# Altium PCB 003-00006.PcbDoc
Units mil, origin at the board's own origin, x right, y up, seen from the top; angles counter-clockwise.
Board outline 1076.1 x 992.63 mil, 2 copper layers (Top Layer, Bottom Layer); 65 components, 66 nets, 188 pads, 60 vias.
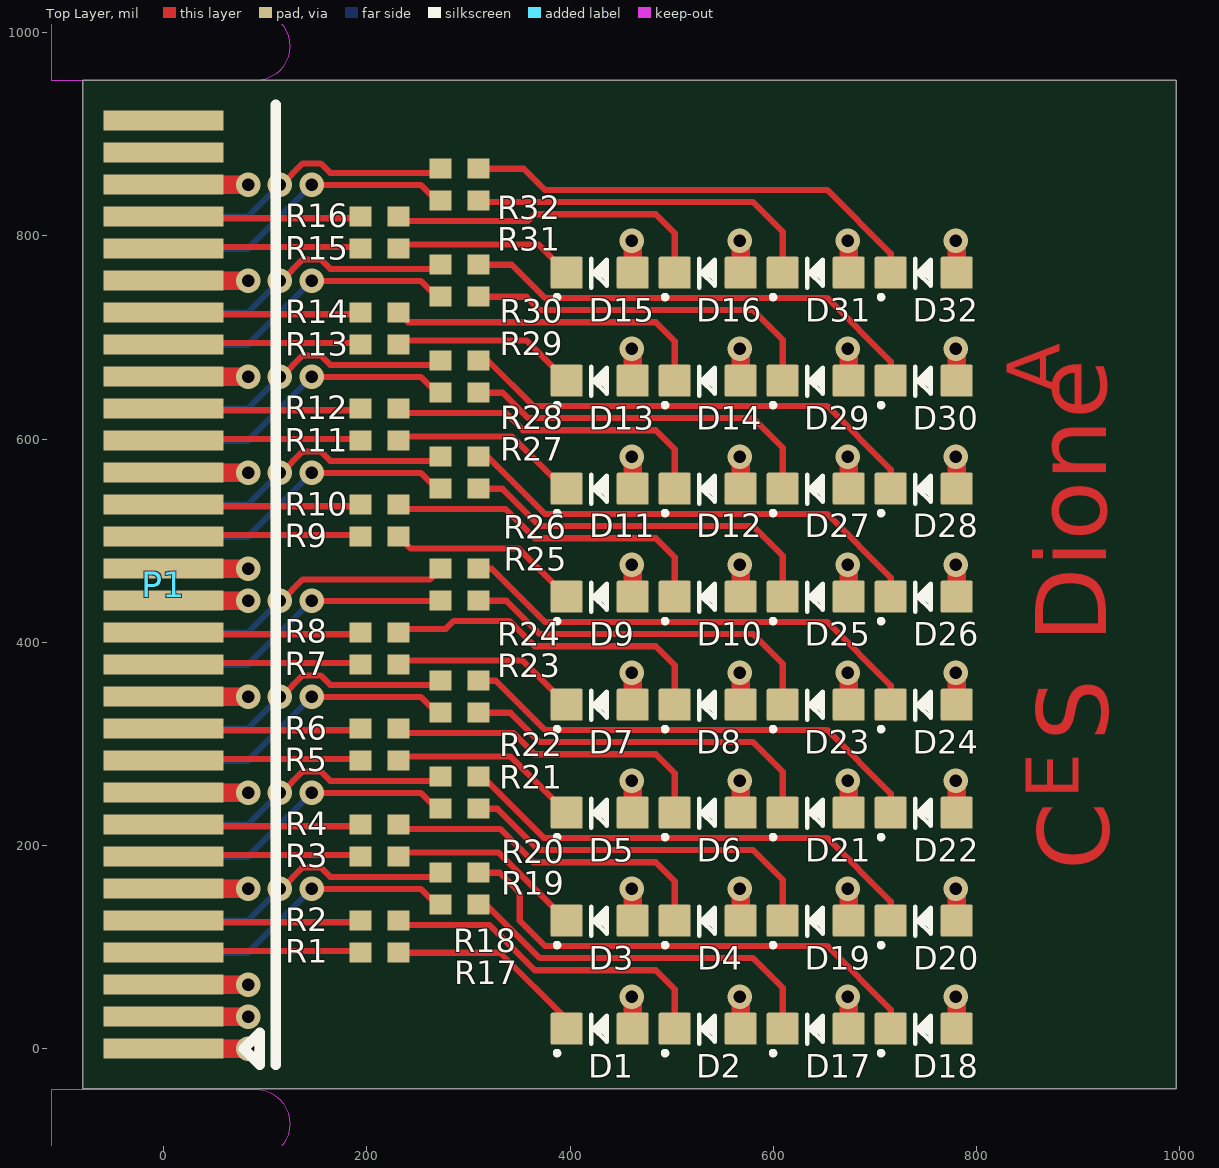
[diagram p0: Top Layer view]
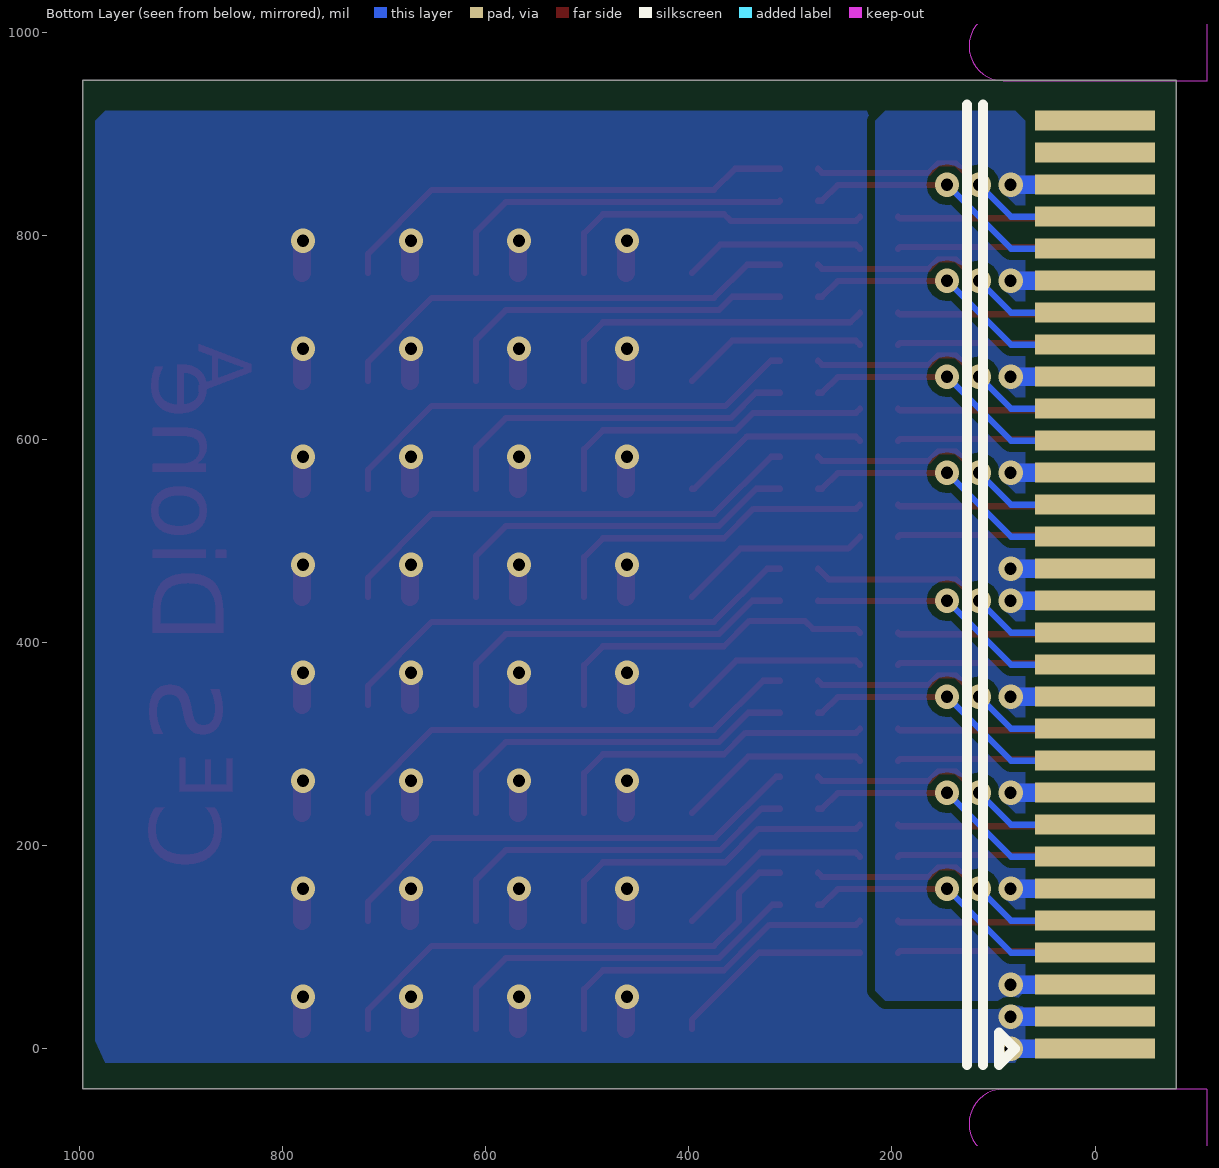
[diagram p1: Bottom Layer view, seen from below]

## Layer stack, top to bottom
Top Solder: solder mask 0.4, Solder Resist, Dk 3.5
Top Layer: signal copper 1.4
Dielectric1: core 12.6, FR-4, Dk 4.8
Bottom Layer: signal copper 1.4
Bottom Solder: solder mask 0.4, Solder Resist, Dk 3.5

## Board outline
-79.72,-39.37 996.38,-39.37 996.38,953.26 -79.72,953.26

## Design rules (kind name [scope] priority, off if disabled: settings)
Clearance Clearance_poly [InPolygon] p1: gap=8
Clearance [All] p2: gap=6
ComponentClearance [All] p1: gap=0 collisioncheckmode=3 verticalgap=0 showdistances=FALSE
DiffPairsRouting [All] p1: maxlimit=6 minlimit=6 mostfreqgap=6 toplayer_minwidth=6 toplayer_maxwidth=6 toplayer_prefwidth=6 bottomlayer_minwidth=6 bottomlayer_maxwidth=6 bottomlayer_prefwidth=6 maxuncoupledlength=500
HoleSize [All] p1: absolutevalues=TRUE maxlimit=500 minlimit=10 maxpercent=80.000 minpercent=20.000
HoleToHoleClearance [All] p1: gap=6 allowstackedmicrovias=TRUE
MinimumSolderMaskSliver [All] p1: minsoldermaskwidth=0
NetAntennae [not(InNet('PRSNTN'))] p1: netantennaetolerance=0
PlaneClearance [All] p1: clearance=10
PlaneConnect [All] p1: planeconnectstyle=Direct reliefexpansion=20 reliefentries=4 reliefconductorwidth=10 reliefairgap=10
PolygonConnect [All] p1: connectstyle=Direct reliefconductorwidth=10 reliefentries=4 polygonreliefangle="90 Angle" airgapwidth=10
RoutingCorners [All] p1: cornerstyle=45-Degree minsetback=30 maxsetback=30
RoutingVias [All] p1: holewidth=12 width=24 viastyle="Through Hole" minholewidth=12 minwidth=24 maxholewidth=28 maxwidth=50
SilkToSilkClearance [All] p1: silktosilkclearance=0
SilkToSolderMaskClearance SilkscreenOverComponentPads [IsPad] p1: minsilkscreentomaskgap=0 clearancetoexposedcopper=TRUE
SolderMaskExpansion [All] p1: expansion=4
UnpouredPolygon [All] p1: allowunpoured=FALSE
Width [All] p1: maxlimit=80 minlimit=6 preferedwidth=6 minimp=50.000000 maximp=50.000000 favimp=50.000000
18 further rules are at their usual default settings.

## Components (designator, comment, footprint, x,y, rotation, side; value= is the part's Value field where it differs from the comment)
D1 "" 005-00018 429.13,19.69 r90 top
D2 "" 005-00018 535.43,19.69 r90 top
D3 "" 005-00018 429.13,125.98 r90 top
D4 "" 005-00018 535.43,125.98 r90 top
D5 "" 005-00018 429.13,232.28 r90 top
D6 "" 005-00018 535.43,232.28 r90 top
D7 "" 005-00018 429.13,338.58 r90 top
D8 "" 005-00018 535.43,338.58 r90 top
D9 "" 005-00018 429.13,444.88 r90 top
D10 "" 005-00018 535.43,444.88 r90 top
D11 "" 005-00018 429.13,551.18 r90 top
D12 "" 005-00018 535.43,551.18 r90 top
D13 "" 005-00018 429.13,657.48 r90 top
D14 "" 005-00018 535.43,657.48 r90 top
D15 "" 005-00018 429.13,763.78 r90 top
D16 "" 005-00018 535.43,763.78 r90 top
D17 "" 005-00018 641.73,19.69 r90 top
D18 "" 005-00018 748.03,19.69 r90 top
D19 "" 005-00018 641.73,125.98 r90 top
D20 "" 005-00018 748.03,125.98 r90 top
D21 "" 005-00018 641.73,232.28 r90 top
D22 "" 005-00018 748.03,232.28 r90 top
D23 "" 005-00018 641.73,338.58 r90 top
D24 "" 005-00018 748.03,338.58 r90 top
D25 "" 005-00018 641.73,444.88 r90 top
D26 "" 005-00018 748.03,444.88 r90 top
D27 "" 005-00018 641.73,551.18 r90 top
D28 "" 005-00018 748.03,551.18 r90 top
D29 "" 005-00018 641.73,657.48 r90 top
D30 "" 005-00018 748.03,657.48 r90 top
D31 "" 005-00018 641.73,763.78 r90 top
D32 "" 005-00018 748.03,763.78 r90 top
P1 "" 005-00024 0,771.65 r90 top
R1 "270" 005-00009 212.6,94.49 r180 top
R2 "270" 005-00009 212.6,125.98 r180 top
R3 "270" 005-00009 212.6,188.98 r180 top
R4 "270" 005-00009 212.6,220.47 r180 top
R5 "270" 005-00009 212.6,283.46 r180 top
R6 "270" 005-00009 212.6,314.96 r180 top
R7 "270" 005-00009 212.6,377.95 r180 top
R8 "270" 005-00009 212.6,409.45 r180 top
R9 "270" 005-00009 212.6,503.94 r180 top
R10 "270" 005-00009 212.6,535.43 r180 top
R11 "270" 005-00009 212.6,598.43 r180 top
R12 "270" 005-00009 212.6,629.92 r180 top
R13 "270" 005-00009 212.6,692.91 r180 top
R14 "270" 005-00009 212.6,724.41 r180 top
R15 "270" 005-00009 212.6,787.4 r180 top
R16 "270" 005-00009 212.6,818.9 r180 top
R17 "270" 005-00009 291.34,141.73 r180 top
R18 "270" 005-00009 291.34,173.23 r180 top
R19 "270" 005-00009 291.34,236.22 r180 top
R20 "270" 005-00009 291.34,267.72 r180 top
R21 "270" 005-00009 291.34,330.71 r180 top
R22 "270" 005-00009 291.34,362.2 r180 top
R23 "270" 005-00009 291.34,440.94 r180 top
R24 "270" 005-00009 291.34,472.44 r180 top
R25 "270" 005-00009 291.34,551.18 r180 top
R26 "270" 005-00009 291.34,582.68 r180 top
R27 "270" 005-00009 291.34,645.67 r180 top
R28 "270" 005-00009 291.34,677.17 r180 top
R29 "270" 005-00009 291.34,740.16 r180 top
R30 "270" 005-00009 291.34,771.65 r180 top
R31 "270" 005-00009 291.34,834.65 r180 top
R32 "270" 005-00009 291.34,866.14 r180 top

## Footprints (in the part's own frame and the unit in brackets; to place one, negate y for a bottom-side part, rotate by r counter-clockwise, add the part's x,y. Pads: shape width x height; smd on the part's side, far side on the other; paste and mask are expansions set on the pad)
005-00009 [mm] "Chip Resistor, 2-Leads, Body 1.00x0.50mm, IPC High Density"
  rect 0.55x0.5 smd: 1(-0.475,0) 2(0.475,0)
  body extent -0.53,-0.28 0.53,0.28, height 0.4
005-00018 [mm]
  rrect10% 0.8x0.8 smd: ANODE(0,-0.825) CATHODE(0,0.825)
  silkscreen extent -0.64,-0.18 0.35,1.1, body extent -0.37,-0.82 0.35,0.82, height 0.68
005-00024 [mm]
  rect 0.5x3 smd far side paste-0.5: 1(-19.6,0) 3(-18.8,0) 5(-18,0) 7(-17.2,0) 9(-16.4,0) 11(-15.6,0) 13(-14.8,0) 15(-14,0) 17(-13.2,0) 19(-12.4,0) 21(-11.6,0) 23(-10.8,0) 25(-10,0) 27(-9.2,0) 29(-8.4,0) 31(-7.6,0) 33(-6.8,0) 35(-6,0) 37(-5.2,0) 39(-4.4,0) 41(-3.6,0) 43(-2.8,0) 45(-2,0) 47(-1.2,0) 49(-0.4,0) 51(0.4,0) 53(1.2,0) 55(2,0) 57(2.8,0) 59(3.6,0)
  rect 0.5x3 smd paste-0.5: 2(-19.6,0) 4(-18.8,0) 6(-18,0) 8(-17.2,0) 10(-16.4,0) 12(-15.6,0) 14(-14.8,0) 16(-14,0) 18(-13.2,0) 20(-12.4,0) 22(-11.6,0) 24(-10.8,0) 26(-10,0) 28(-9.2,0) 30(-8.4,0) 32(-7.6,0) 34(-6.8,0) 36(-6,0) 38(-5.2,0) 40(-4.4,0) 42(-3.6,0) 44(-2.8,0) 46(-2,0) 48(-1.2,0) 50(-0.4,0) 52(0.4,0) 54(1.2,0) 56(2,0) 58(2.8,0) 60(3.6,0)
  Keep-Out Layer board cut-out: -22.34,2.8 -20.621,2.8 -20.615,2.794 -20.615,-2.283 -20.613,-2.286 -20.679,-2.616 -20.866,-2.897 -21.146,-3.084 -21.476,-3.15 -21.476,-3.15 -21.479,-3.15 -21.808,-3.084 -22.088,-2.897 -22.274,-2.618 -22.34,-2.289 -22.34,-2.289
  Keep-Out Layer board cut-out: 4.6,2.8 6.319,2.8 6.325,2.794 6.325,-2.283 6.327,-2.286 6.261,-2.616 6.074,-2.897 5.794,-3.084 5.464,-3.15 5.464,-3.15 5.461,-3.15 5.132,-3.084 4.852,-2.897 4.666,-2.618 4.6,-2.289 4.6,-2.289
  silkscreen extent -20,-2.8 4,-2

## Part data
D1 D2 D3 D4 D5 D6 D7 D8 D9 D10 D11 D12 D13 D14 D15 D16 D17 D18 D19 D20 D21 D22 D23 D24 D25 D26 D27 D28 D29 D30 D31 D32: library part 013-00003, "LED Green SMD 20mA 2.2V 0603"
P1: library part 008-00005, "Connector, PCB edge, MEC8, 30x2 Pin"
R1 R2 R3 R4 R5 R6 R7 R8 R9 R10 R11 R12 R13 R14 R15 R16 R17 R18 R19 R20 R21 R22 R23 R24 R25 R26 R27 R28 R29 R30 R31 R32: library part 009-00022, "RES 270 OHM 1/16W 5% 0402"

## Via types
v1: diameter 24, hole 12, Top Layer to Bottom Layer, 60 vias

## Nets (pads, with @x,y where several pads share a name; then routed paths per layer and width w, separated by ;. In a path a pad name is that pad's centre, name@x,y a point inside that pad or via, vN(x,y) a via of type N, cw(c..) or ccw(c..) an arc to the next point about the centre after c; other vN are vias at no path point)
3.3V: D1.ANODE D2.ANODE D3.ANODE D4.ANODE D5.ANODE D6.ANODE D7.ANODE D8.ANODE D9.ANODE D10.ANODE D11.ANODE D12.ANODE D13.ANODE D14.ANODE D15.ANODE D16.ANODE D17.ANODE D18.ANODE D19.ANODE D20.ANODE D21.ANODE D22.ANODE D23.ANODE D24.ANODE D25.ANODE D26.ANODE D27.ANODE D28.ANODE D29.ANODE D30.ANODE D31.ANODE D32.ANODE P1.1 P1.2 P1.3 P1.4 | length 1353.4
  Top Layer w18: P1.2 v1(83.11,0) ; P1.4 v1(83.11,31.5) ; v1(460.63,51.18) 461.61,50.2 D1.ANODE ; v1(460.63,157.48) 461.61,156.5 D3.ANODE ; v1(460.63,263.78) 461.61,262.8 D5.ANODE ; v1(460.63,370.08) 461.61,369.09 D7.ANODE ; v1(460.63,582.68) 461.61,581.69 D11.ANODE ; v1(460.63,688.98) 461.61,687.99 D13.ANODE ; v1(460.63,795.28) 461.61,794.29 D15.ANODE ; D9.ANODE v1@461.61,475.39 ; v1(566.93,51.18) 567.91,50.2 D2.ANODE ; v1(566.93,157.48) 567.91,156.5 D4.ANODE ; v1(566.93,263.78) 567.91,262.8 D6.ANODE ; v1(566.93,370.08) 567.91,369.09 D8.ANODE ; v1(566.93,476.38) 567.91,475.39 D10.ANODE ; v1(566.93,582.68) 567.91,581.69 D12.ANODE ; v1(566.93,688.98) 567.91,687.99 D14.ANODE ; v1(566.93,795.28) 567.91,794.29 D16.ANODE ; v1(673.23,51.18) 674.21,50.2 D17.ANODE ; v1(673.23,157.48) 674.21,156.5 D19.ANODE ; v1(673.23,263.78) 674.21,262.8 D21.ANODE ; v1(673.23,370.08) 674.21,369.09 D23.ANODE ; v1(673.23,476.38) 674.21,475.39 D25.ANODE ; v1(673.23,582.68) 674.21,581.69 D27.ANODE ; v1(673.23,688.98) 674.21,687.99 D29.ANODE ; v1(673.23,795.28) 674.21,794.29 D31.ANODE ; v1(779.53,51.18) 780.51,50.2 D18.ANODE ; v1(779.53,157.48) 780.51,156.5 D20.ANODE ; v1(779.53,263.78) 780.51,262.8 D22.ANODE ; v1(779.53,370.08) 780.51,369.09 D24.ANODE ; v1(779.53,582.68) 780.51,581.69 D28.ANODE ; v1(779.53,688.98) 780.51,687.99 D30.ANODE ; v1(779.53,795.28) 780.51,794.29 D32.ANODE ; D26.ANODE v1@780.51,475.39 ; v1@461.61,475.39 v1(460.63,476.38) v1@461.61,475.39
  Bottom Layer w18: P1.1 v1(83.11,0) ; P1.3 v1(83.11,31.5)
  other v1: 779.53,476.38
D0_N: P1.10 R2.2 | length 195.1
  Top Layer w6: P1.10 1.5,124.48 192.39,124.48 R2.2
D0_P: P1.8 R1.2 | length 195.1
  Top Layer w6: P1.8 1.5,95.99 192.39,95.99 R1.2
D1_N: P1.16 R4.2 | length 195.1
  Top Layer w6: P1.16 1.5,218.97 192.39,218.97 R4.2
D1_P: P1.14 R3.2 | length 195.1
  Top Layer w6: P1.14 1.5,190.48 192.39,190.48 R3.2
D2_N: P1.22 R6.2 | length 195.1
  Top Layer w6: P1.22 1.5,313.46 192.39,313.46 R6.2
D2_P: P1.20 R5.2 | length 195.1
  Top Layer w6: P1.20 1.5,284.97 192.39,284.97 R5.2
D3_N: P1.28 R8.2 | length 195.1
  Top Layer w6: P1.28 1.5,407.94 192.39,407.94 R8.2
D3_P: P1.26 R7.2 | length 195.1
  Top Layer w6: P1.26 1.5,379.46 192.39,379.46 R7.2
D4_N: P1.36 R10.2 | length 195.1
  Top Layer w6: P1.36 1.5,533.93 192.39,533.93 R10.2
D4_P: P1.34 R9.2 | length 195.1
  Top Layer w6: P1.34 1.5,505.44 192.39,505.44 R9.2
D5_N: P1.42 R12.2 | length 195.1
  Top Layer w6: P1.42 1.5,628.42 192.39,628.42 R12.2
D5_P: P1.40 R11.2 | length 195.1
  Top Layer w6: P1.40 1.5,599.93 192.39,599.93 R11.2
D6_N: P1.48 R14.2 | length 195.1
  Top Layer w6: P1.48 1.5,722.91 192.39,722.91 R14.2
D6_P: P1.46 R13.2 | length 195.1
  Top Layer w6: P1.46 1.5,694.42 192.39,694.42 R13.2
D7_N: P1.54 R16.2 | length 195.1
  Top Layer w6: P1.54 1.5,817.39 192.39,817.39 R16.2
D7_P: P1.52 R15.2 | length 195.1
  Top Layer w6: P1.52 1.5,788.91 192.39,788.91 R15.2
D8_N: P1.9 R18.2 | length 299.9
  Top Layer w6: v1(114.17,157.48) 115.97,157.48 136.97,178.48 154.37,178.48 163.7,169.15 268.56,169.15 R18.2
  Bottom Layer w6: P1.9 82.68,125.98 v1(114.17,157.48)
D8_P: P1.7 R17.2 | length 305.3
  Top Layer w6: v1(145.67,157.48) 146,157.15 253.35,157.15 268.77,141.73 R17.2
  Bottom Layer w6: P1.7 82.68,94.49 v1(145.67,157.48)
D9_N: P1.15 R20.2 | length 299.9
  Top Layer w6: v1(114.17,251.97) 115.97,251.97 136.97,272.97 154.37,272.97 163.7,263.64 268.56,263.64 R20.2
  Bottom Layer w6: P1.15 82.68,220.47 v1(114.17,251.97)
D9_P: P1.13 R19.2 | length 305.3
  Top Layer w6: v1(145.67,251.97) 146,251.64 253.35,251.64 268.77,236.22 R19.2
  Bottom Layer w6: P1.13 82.68,188.98 v1(145.67,251.97)
D10_N: P1.21 R22.2 | length 301.7
  Top Layer w6: R22.2 268.56,358.13 163.7,358.13 154.37,367.46 136.97,367.46 v1@115.97,346.46 ; v1@115.97,346.46 v1(114.17,346.46) v1@115.97,346.46
  Bottom Layer w6: P1.21 82.68,314.96 v1(114.17,346.46)
D10_P: P1.19 R21.2 | length 305.7
  Top Layer w6: R21.2 268.77,330.71 253.35,346.13 v1@146,346.13 ; v1@146,346.13 v1(145.67,346.46) v1@146,346.13
  Bottom Layer w6: P1.19 82.68,283.46 v1(145.67,346.46)
D11_N: P1.27 R24.2 | length 298.7
  Top Layer w6: v1(114.17,440.94) 115.97,440.94 136.97,461.94 262.14,461.94 R24.2
  Bottom Layer w6: P1.27 82.68,409.45 v1(114.17,440.94)
D11_P: P1.25 R23.2 | length 299
  Top Layer w6: v1(145.67,440.94) 146,440.61 272.31,440.61 R23.2
  Bottom Layer w6: P1.25 82.68,377.95 v1(145.67,440.94)
D12_N: P1.35 R26.2 | length 299.9
  Top Layer w6: v1(114.17,566.93) 115.97,566.93 136.97,587.93 154.37,587.93 163.7,578.6 268.56,578.6 R26.2
  Bottom Layer w6: P1.35 82.68,535.43 v1(114.17,566.93)
D12_P: P1.33 R25.2 | length 305.3
  Top Layer w6: v1(145.67,566.93) 146,566.6 253.35,566.6 268.77,551.18 R25.2
  Bottom Layer w6: P1.33 82.68,503.94 v1(145.67,566.93)
D13_N: P1.41 R28.2 | length 299.9
  Top Layer w6: v1(114.17,661.42) 115.97,661.42 136.97,682.42 154.37,682.42 163.7,673.09 268.56,673.09 R28.2
  Bottom Layer w6: P1.41 82.68,629.92 v1(114.17,661.42)
D13_P: P1.39 R27.2 | length 305.3
  Top Layer w6: v1(145.67,661.42) 146,661.09 253.35,661.09 268.77,645.67 R27.2
  Bottom Layer w6: P1.39 82.68,598.43 v1(145.67,661.42)
D14_N: P1.47 R30.2 | length 299.9
  Top Layer w6: v1(114.17,755.91) 115.97,755.91 136.97,776.91 154.37,776.91 163.7,767.57 268.56,767.57 R30.2
  Bottom Layer w6: P1.47 82.68,724.41 v1(114.17,755.91)
D14_P: P1.45 R29.2 | length 305.3
  Top Layer w6: v1(145.67,755.91) 146,755.57 253.35,755.57 268.77,740.16 R29.2
  Bottom Layer w6: P1.45 82.68,692.91 v1(145.67,755.91)
D15_N: P1.53 R32.2 | length 299.9
  Top Layer w6: v1(114.17,850.39) 115.97,850.39 136.97,871.39 154.37,871.39 163.7,862.06 268.56,862.06 R32.2
  Bottom Layer w6: P1.53 82.68,818.9 v1(114.17,850.39)
D15_P: P1.51 R31.2 | length 305.3
  Top Layer w6: v1(145.67,850.39) 146,850.06 253.35,850.06 268.77,834.65 R31.2
  Bottom Layer w6: P1.51 82.68,787.4 v1(145.67,850.39)
GND: P1.5 P1.6 P1.11 P1.12 P1.17 P1.18 P1.23 P1.24 P1.29 P1.30 P1.31 P1.32 P1.37 P1.38 P1.43 P1.44 P1.49 P1.50 P1.55 P1.56 | length 1662.2
  Top Layer w18: P1.6 v1(83.11,62.99) ; P1.12 v1(83.11,157.48) ; P1.18 v1(83.11,251.97) ; P1.24 v1(83.11,346.46) ; P1.30 v1(83.11,440.94) ; P1.32 v1(83.11,472.44) ; P1.38 v1(83.11,566.93) ; P1.44 v1(83.11,661.42) ; P1.50 v1(83.11,755.91) ; P1.56 v1(83.11,850.39)
  Bottom Layer w18: P1.5 v1(83.11,62.99) ; P1.11 v1(83.11,157.48) ; P1.17 v1(83.11,251.97) ; P1.23 v1(83.11,346.46) ; P1.29 v1(83.11,440.94) ; P1.31 v1(83.11,472.44) ; P1.37 v1(83.11,566.93) ; P1.43 v1(83.11,661.42) ; P1.49 v1(83.11,755.91) ; P1.55 v1(83.11,850.39)
NetD1_CATHODE: D1.CATHODE R1.1 | length 201.7
  Top Layer w6: R1.1 330.98,94.49 396.65,28.81 D1.CATHODE
NetD2_CATHODE: D2.CATHODE R2.1 | length 338.4
  Top Layer w6: R2.1 235.38,121.91 320.5,121.91 333.39,109.01 ; 333.42,109.01 365.2,77.24 484.25,77.24 502.95,58.54 D2.CATHODE
NetD3_CATHODE: D3.CATHODE R3.1 | length 194.8
  Top Layer w6: R3.1 235.38,193.06 329.58,193.06 D3.CATHODE
NetD4_CATHODE: D4.CATHODE R4.1 | length 333.5
  Top Layer w6: R4.1 235.38,216.39 331.29,216.39 364.15,183.54 484.25,183.54 502.95,164.83 D4.CATHODE
NetD5_CATHODE: D5.CATHODE R5.1 | length 189.9
  Top Layer w6: R5.1 235.38,287.54 341.39,287.54 D5.CATHODE
NetD6_CATHODE: D6.CATHODE R6.1 | length 328.7
  Top Layer w6: R6.1 235.38,310.88 344.15,310.88 365.2,289.83 484.25,289.83 502.95,271.13 D6.CATHODE
NetD7_CATHODE: D7.CATHODE R7.1 | length 185
  Top Layer w6: R7.1 235.38,382.03 353.2,382.03 D7.CATHODE
NetD8_CATHODE: D8.CATHODE R8.1 | length 333.4
  Top Layer w6: R8.1 235.05,413.2 277.61,413.2 285.53,421.12 340.22,421.12 365.2,396.13 484.25,396.13 502.95,377.43 D8.CATHODE
NetD9_CATHODE: D9.CATHODE R9.1 | length 189.8
  Top Layer w6: R9.1 242.97,492.27 349.27,492.27 D9.CATHODE
NetD10_CATHODE: D10.CATHODE R10.1 | length 331.9
  Top Layer w6: R10.1 235.38,531.35 336.28,531.35 365.2,502.43 484.25,502.43 502.95,483.73 D10.CATHODE
NetD11_CATHODE: D11.CATHODE R11.1 | length 188.3
  Top Layer w6: R11.1 235.38,602.5 342.93,602.5 394.25,551.18 D11.CATHODE
NetD12_CATHODE: D12.CATHODE R12.1 | length 327
  Top Layer w6: R12.1 235.38,625.84 336.56,625.84 353.67,608.73 484.25,608.73 502.95,590.03 D12.CATHODE
NetD13_CATHODE: D13.CATHODE R13.1 | length 183.4
  Top Layer w6: R13.1 235.38,696.99 357.14,696.99 D13.CATHODE
NetD14_CATHODE: D14.CATHODE R14.1 | length 322.1
  Top Layer w6: R14.1 240.68,715.03 484.25,715.03 502.95,696.33 D14.CATHODE
NetD15_CATHODE: D15.CATHODE R15.1 | length 178.5
  Top Layer w6: R15.1 235.38,791.48 368.95,791.48 D15.CATHODE
NetD16_CATHODE: D16.CATHODE R16.1 | length 322.6
  Top Layer w6: R16.1 235.38,814.82 358.69,814.82 365.2,821.33 484.25,821.33 502.95,802.63 D16.CATHODE
NetD17_CATHODE: D17.CATHODE R17.1 | length 373.4
  Top Layer w6: R17.1 317.68,141.73 370.17,89.24 580.06,89.24 609.25,60.04 D17.CATHODE
NetD18_CATHODE: D18.CATHODE R18.1 | length 496.3
  Top Layer w6: R18.1 330.71,173.23 350.39,153.54 350.39,125.98 375.14,101.24 652.87,101.24 715.55,38.56 D18.CATHODE
NetD19_CATHODE: D19.CATHODE R19.1 | length 368.5
  Top Layer w6: R19.1 328.43,236.22 369.12,195.54 580.06,195.54 609.25,166.34 D19.CATHODE
NetD20_CATHODE: D20.CATHODE R20.1 | length 475.3
  Top Layer w6: R20.1 313.91,267.72 374.09,207.54 652.87,207.54 715.55,144.86 D20.CATHODE
NetD21_CATHODE: D21.CATHODE R21.1 | length 363.6
  Top Layer w6: R21.1 341.3,330.71 370.17,301.83 580.06,301.83 609.25,272.64 D21.CATHODE
NetD22_CATHODE: D22.CATHODE R22.1 | length 470.4
  Top Layer w6: R22.1 326.77,362.2 375.14,313.83 652.87,313.83 715.55,251.16 D22.CATHODE
NetD23_CATHODE: D23.CATHODE R23.1 | length 365.3
  Top Layer w6: R23.1 337.36,440.94 370.17,408.13 580.06,408.13 609.25,378.94 D23.CATHODE
NetD24_CATHODE: D24.CATHODE R24.1 | length 472
  Top Layer w6: R24.1 322.83,472.44 375.14,420.13 652.87,420.13 715.55,357.45 D24.CATHODE
NetD25_CATHODE: D25.CATHODE R25.1 | length 366.9
  Top Layer w6: R25.1 333.42,551.18 370.17,514.43 580.06,514.43 609.25,485.24 D25.CATHODE
NetD26_CATHODE: D26.CATHODE R26.1 | length 473.6
  Top Layer w6: R26.1 318.9,582.68 375.14,526.43 652.87,526.43 715.55,463.75 D26.CATHODE
NetD27_CATHODE: D27.CATHODE R27.1 | length 362
  Top Layer w6: R27.1 333.71,645.67 358.64,620.73 580.06,620.73 609.25,591.54 D27.CATHODE
NetD28_CATHODE: D28.CATHODE R28.1 | length 468.8
  Top Layer w6: R28.1 319.18,677.17 363.61,632.73 652.87,632.73 715.55,570.05 D28.CATHODE
NetD29_CATHODE: D29.CATHODE R29.1 | length 357.1
  Top Layer w6: R29.1 357.05,740.16 370.17,727.03 580.06,727.03 609.25,697.83 D29.CATHODE
NetD30_CATHODE: D30.CATHODE R30.1 | length 463.9
  Top Layer w6: R30.1 342.52,771.65 375.14,739.03 652.87,739.03 715.55,676.35 D30.CATHODE
NetD31_CATHODE: D31.CATHODE R31.1 | length 352.2
  Top Layer w6: R31.1 311.35,833.33 580.06,833.33 609.25,804.13 D31.CATHODE
NetD32_CATHODE: D32.CATHODE R32.1 | length 459
  Top Layer w6: R32.1 354.33,866.14 375.14,845.33 652.87,845.33 715.55,782.65 D32.CATHODE
pads on no net: P1.57 P1.58 P1.59 P1.60

## Polygon pours and split planes (outlines as drawn)
GND on Bottom Layer "Bottom Layer-GND" (solid, pour order 10): 68.9,913.39 78.74,923.23 206.69,923.23 216.54,913.39 216.54,647.64 216.54,470.47 216.54,293.31 216.54,66.93 216.54,57.09 206.69,47.24 78.74,47.24 68.9,57.09
3.3V on Bottom Layer "Bottom Layer-3.3V" (solid, pour order 12): 68.9,913.39 78.74,923.23 974.41,923.23 984.25,913.39 984.25,450.79 984.25,96.46 984.25,7.87 974.41,-14 925.2,-14 659.45,-14 511.81,-14 295.28,-14 78.74,-14 68.9,7.87

## Other copper
Top Layer:
  text "A" at 899.29,645.2 h90 r90
  text "Dione" at 950.79,399.61 h120 r90
  text "S" at 952.44,302.68 h120 r90
  text "E" at 917.99,245.6 h90 r90
  text "C" at 953.37,175.83 h120 r90

## Silkscreen, mask and mechanical layers (free items; w line width, h text height)
Top Solder:
  text "Dione" at 950.79,399.61 h120 r90
  text "S" at 952.56,303.98 h120 r90
  text "E" at 918.37,246.46 h90 r90
  text "C" at 953.37,175.83 h120 r90
Board Outline To Gerbers:
  lines w10: -79.72,-39.37 -79.72,952.76 90.1,952.76 90.1,952.46 96.16,953.26 996.38,953.26 996.38,-39.37 -79.72,-39.37
Board Outline To Edit:
  the board outline again, w10